# EAGLE board v1_2 (EAGLE 6.5.0)
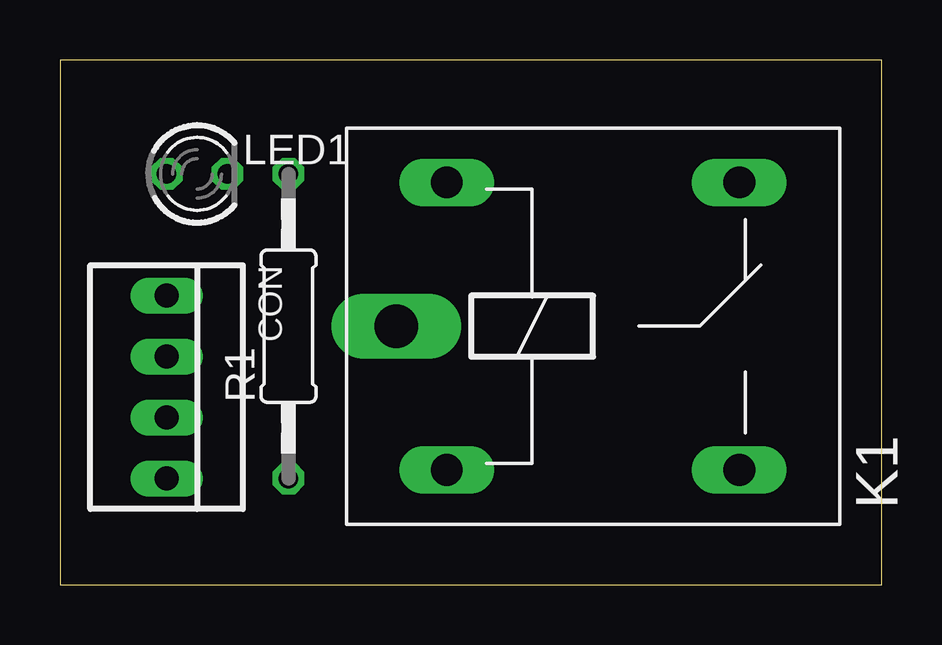
[diagram p0: board, top side]
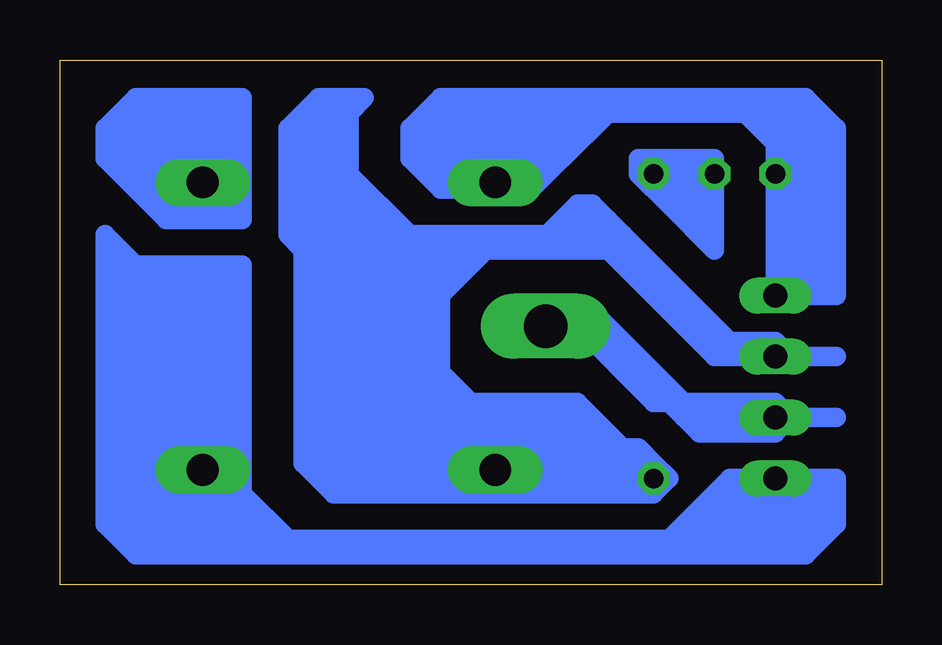
[diagram p1: board, bottom side, seen from below]

Size 34.27 x 21.89 mm. Coordinates in mm from the lower left corner, seen from the top.
Outline: 0,0 34.27,0 34.27,21.89 0,21.89 0,0
Copper layers (1*16): Top 0.035mm / dielectric 1.5mm / Bottom 0.035mm
Design rules "default": minimum track width 10mil, minimum drill 24mil, track to track 8mil, track to pad 8mil, pad to pad 8mil, via to via 8mil, smd to smd 8mil, copper to edge 40mil, drill to drill 8mil, minimum pad ring 10mil, minimum via ring 8mil, stop-mask expansion 4mil, vias tented up to drill 0mil, thermal gap 10mil

## Footprints (pad centres in the part's own frame; a part is rotated, then mirrored left to right if it is on the bottom)
22-23-2041 = drill 1 long: 1 -3.81,0; 2 -1.27,0; 3 1.27,0; 4 3.81,0
ZF112 = drill 1.321 long: 1 -6.096,5.994; 2 -6.096,-5.994; O 6.096,5.994; S 6.096,-5.994 | drill 1.803 long: P -8.204,0
LED3MM = drill 0.813 octagon: A -1.27,0; K 1.27,0
0207/12 = drill 0.813 octagon: 1 -6.35,0; 2 6.35,0

## Placement (x,y rotation side)
CON  22-23-2041  [22-23-2041]  4.45,8.26 270 top
K1  ZF112  [ZF112]  22.23,10.79 0 top
LED1  [LED3MM]  5.71,17.14 0 top
R1  [0207/12]  9.53,10.79 90 top

## Library data of the parts
CON = con-molex; MF: MOLEX; MPN: 22-23-2041; OC_FARNELL: 1462920; OC_NEWARK: 38C0355
K1 = relay; OC_FARNELL: unknown; OC_NEWARK: unknown
LED1 = led
R1 = rcl

## Nets
GND: CON.2 K1.2 R1.1
N$1: LED1.K R1.2
OUTPUT1: CON.3 K1.P
OUTPUT2: CON.4 K1.S
SWITCHED: CON.1 K1.1 LED1.A

## Tracks (layer width: path | path; a pad name or v marks a point on that pad's centre or on a via)
GND
  Bottom 0.813: CON.2 6.99,9.53 11.43,13.97 12.06,13.97 | 14.61,13.97 16.51,13.97 | 17.14,13.97 18.41,13.97 | 18.41,13.97 22.23,13.97 | 23.5,12.7 23.5,5.71 22.23,4.45 | 22.23,4.45 19.05,4.45 K1.2 18.41,4.45 R1.1 8.89,4.45 | 8.89,4.45 9.53,5.08 | 9.53,5.08 14.61,5.08 | 14.61,5.08 14.61,3.81 | 14.61,3.81 13.97,3.81 | 13.97,3.81 9.53,3.81 8.89,4.45 | 9.53,5.08 10.16,5.71 10.79,5.71 | 11.43,5.71 12.7,5.71 | 12.7,5.71 13.34,5.71 | 13.97,5.71 13.34,5.71 | 13.34,5.71 13.97,6.35 15.88,6.35 | 17.78,3.81 17.78,6.35 17.14,6.35 | 17.78,3.81 14.61,3.81 | 13.97,3.81 13.97,5.71 | 13.97,5.71 17.14,5.71 17.14,5.08 14.61,5.08 | 17.78,3.81 22.23,3.81 | 22.23,3.81 24.13,6.35 | 24.13,6.35 24.13,13.34 | 24.13,13.34 23.5,13.97 | 23.5,13.97 22.23,13.97 | 22.23,13.97 23.5,12.7 | 23.5,12.7 23.5,13.34 | 16.51,6.35 15.88,6.35 | 15.88,6.35 17.14,7.62 | 17.14,7.62 18.41,8.89 18.41,12.06 16.51,13.97 | 16.51,13.97 17.14,13.97 | 17.14,13.97 18.41,12.7 18.41,8.26 | 18.41,8.26 16.51,6.35 | 16.51,6.35 17.14,6.35 | 17.14,6.35 18.41,7.62 | 18.41,7.62 18.41,8.26 | 18.41,7.62 18.41,5.08 21.59,5.08 | 22.23,5.71 22.86,6.35 | 22.86,6.35 22.86,5.71 22.23,5.71 | 22.23,5.71 21.59,5.08 | 21.59,5.08 22.23,4.45 | 22.23,4.45 22.23,13.34 22.86,12.7 22.86,6.35 | 21.59,5.08 21.59,13.34 | 18.41,13.34 18.41,13.97 | 10.79,14.61 6.35,10.16 4.45,10.16 3.81,9.53 CON.2 | 11.43,14.61 6.99,10.16 | 11.43,14.61 10.79,14.61 | 10.79,14.61 11.43,15.24 | 11.43,15.24 12.06,15.88 12.7,15.88 13.97,14.61 | 13.97,14.61 14.61,13.97 | 14.61,13.97 13.97,13.97 | 13.34,13.97 12.06,13.97 | 12.06,13.97 11.43,14.61 | 11.43,14.61 12.06,14.61 12.7,15.24 | 11.43,15.24 12.7,15.24 | 12.7,15.24 13.97,13.97 | 13.97,13.97 13.34,13.97 | 13.34,13.97 12.7,14.61
  Bottom 0.813: 13.97,14.61 19.68,14.61 | 19.68,14.61 20.32,14.61 | 20.32,14.61 20.95,14.61 | 20.95,14.61 22.86,14.61 | 22.86,14.61 23.5,13.97 | 24.13,6.35 24.13,5.08 22.86,3.81 22.23,3.81 | 19.68,14.61 22.23,17.14 | 22.23,17.14 22.23,19.68 21.59,20.32 23.5,20.32 24.77,19.05 24.77,18.41 | 24.77,18.41 24.77,17.78 | 24.77,14.61 24.13,13.97 24.13,13.34 | 23.5,14.61 24.77,14.61 | 24.77,14.61 24.77,17.78 | 24.77,17.78 22.86,19.68 23.5,19.68 24.77,18.41 | 24.77,18.41 23.5,18.41 22.86,19.05 22.86,16.51 | 20.95,14.61 22.86,16.51 | 22.86,16.51 22.23,17.14 | 22.23,17.14 22.23,16.51 20.32,14.61 | 22.86,14.61 23.5,14.61 | 23.5,14.61 24.13,15.24 22.23,15.24 23.5,16.51 24.13,15.88 23.5,15.88 23.5,17.78 24.13,17.78 24.13,16.51 | 17.14,7.62 12.7,7.62 10.79,5.71 | 10.79,5.71 11.43,5.71 | 11.43,5.71 12.7,6.99 13.97,6.99 | 15.88,6.99 13.97,6.99 | 13.97,6.99 12.7,5.71 | 12.7,5.71 12.7,6.35 | 1.91,9.53 CON.2
N$1
  Bottom 0.813: LED1.K R1.2 | 6.99,16.51 6.99,15.88 | 6.99,15.88 8.26,15.88 | 8.89,15.88 10.16,17.14 10.16,17.78 6.99,17.78 LED1.K | LED1.K 6.99,16.51 | 6.99,16.51 8.89,16.51 | 6.99,15.88 6.99,13.97 8.89,15.88 | 8.89,15.88 8.26,15.88 | 8.26,15.88 7.62,15.24
N$3
  Bottom 0.813: 2.54,3.81 3.17,3.81 | 5.71,3.81 6.35,3.81 7.62,2.54 6.99,2.54 5.71,3.81 | 5.71,3.81 3.17,3.81 | 3.17,3.81 2.54,3.17 2.54,2.54 3.17,1.91 5.71,1.91 | 6.35,1.91 5.71,1.91 | 5.71,1.91 4.45,3.17 5.08,3.17 5.71,2.54 3.17,2.54 3.81,3.17 3.17,3.17
N$6
  Bottom 0.813: 26.67,16.51 26.67,20.32 31.11,20.32 32.38,19.05 32.38,17.78 29.84,15.24 26.67,15.24 26.67,16.51 | 26.67,16.51 27.3,15.88 29.84,15.88 31.75,17.78 31.75,19.05 31.11,19.68 27.3,19.68 27.3,16.51 29.84,16.51 31.11,17.78 31.11,18.41 30.48,19.05 | 30.48,19.05 31.11,19.05 | 30.48,19.05 27.94,19.05 27.94,17.14 29.84,17.14 30.48,17.78 30.48,18.41 28.57,18.41 28.57,17.78 29.84,17.78
OUTPUT1
  Bottom 0.813: CON.3 5.71,6.99 | 5.71,6.99 8.26,6.99 | 8.26,6.99 8.89,7.62 | 8.89,7.62 12.06,10.79 K1.P | 4.45,6.35 CON.3 | CON.3 5.08,6.35 | 5.08,6.35 7.62,6.35 8.26,6.99 | 8.26,6.99 8.26,7.62 | 8.26,7.62 5.08,7.62 | 5.08,7.62 CON.3 | CON.3 4.45,7.62 | 5.08,7.62 4.45,7.62 | 4.45,7.62 3.81,6.99 4.45,6.35 | 4.45,6.35 5.08,6.35 | 5.08,6.35 5.71,6.99 | 8.26,7.62 12.06,11.43 15.88,11.43 15.88,10.16 13.97,10.16 | 12.06,10.16 13.97,10.16 | 13.97,10.16 14.61,10.79 | 14.61,10.79 15.24,10.79 | 14.61,10.79 12.7,10.79 9.53,7.62 8.89,7.62 | CON.3 1.91,6.99
OUTPUT2
  Bottom 0.813: K1.S 25.4,1.91 | 25.4,1.91 24.77,1.91 | 24.77,1.91 8.89,1.91 | 8.89,1.91 6.99,1.91 CON.4 | 8.89,1.91 6.35,4.45 1.91,4.45 1.91,2.54 3.17,1.27 31.11,1.27 32.38,2.54 32.38,14.61 31.11,13.34 | 31.11,13.34 26.67,13.34 26.67,3.81 24.77,1.91 | 31.75,13.34 31.11,13.34 | 31.11,13.34 31.75,12.7 | 25.4,1.91 31.11,1.91 31.75,2.54 26.67,2.54 28.57,4.45 31.75,4.45 31.75,3.17 28.57,3.17 | 27.94,3.17 28.57,3.17 | 28.57,3.17 29.21,3.81 | 29.21,3.81 28.57,3.81 | 29.21,3.81 31.11,3.81
SWITCHED
  Bottom 0.813: 4.45,12.7 LED1.A 4.45,18.41 5.71,19.68 | 4.45,12.7 CON.1 1.91,12.06 1.91,18.41 | K1.1 13.34,19.58 13.34,19.68 12.06,19.68 | 11.43,19.68 5.71,19.68 | 1.91,18.41 3.17,19.68 3.81,19.68 | 5.08,19.68 5.71,19.68 | 1.91,18.41 1.91,19.05 3.17,20.32 13.34,20.32 | 13.34,20.32 13.34,17.78 | 13.34,17.78 14.61,16.51 15.88,16.51 | 13.34,17.78 11.43,19.68 | 11.43,19.68 12.06,19.68 | 12.06,19.68 15.24,16.51 | 15.88,16.51 17.14,16.51 | 17.14,16.51 13.97,19.68 | 13.97,19.68 13.34,20.32 | 13.34,20.32 18.41,20.32 19.68,19.05 19.68,17.78 18.41,16.51 17.78,16.51 | 17.78,16.51 17.14,16.51 | 13.97,19.68 18.41,19.68 19.05,19.05 19.05,17.78 17.78,16.51 | 17.78,16.51 16.51,17.78 | 16.51,17.78 15.24,19.05 16.51,19.05 | 16.51,19.05 18.41,19.05 18.41,17.78 17.14,17.78 17.78,17.14 17.78,17.78 16.51,19.05 | 16.51,19.05 16.51,18.41 17.14,18.41 | 17.78,18.41 17.14,18.41 | 17.14,18.41 16.51,17.78 | 13.97,18.41 15.88,16.51 | 4.45,12.7 3.81,12.7 | 3.17,12.7 2.54,12.7 2.54,13.34 | 2.54,17.14 2.54,18.41 | 3.17,18.41 3.81,18.41 5.08,19.68 | 5.08,19.68 3.81,19.68 | 3.81,19.68 2.54,18.41 | 2.54,18.41 3.17,18.41 | 3.17,18.41 3.81,19.05 3.81,12.7 | 3.81,12.7 3.17,12.7 | 3.17,12.7 2.54,13.34 | 2.54,13.34 2.54,17.14 | 2.54,17.14 3.17,17.78 3.17,12.7
(copper drawn outside any net)
  shapes: Bottom area x2